# Altium PCB RL_2_Mini_V10.3.PcbDoc
Units mm, origin at the board's own origin, x right, y up, seen from the top; angles counter-clockwise.
Board outline 37.5 x 37.5 mm, 2 copper layers (Top Layer, Bottom Layer); 41 components, 29 nets, 169 pads, 0 vias.
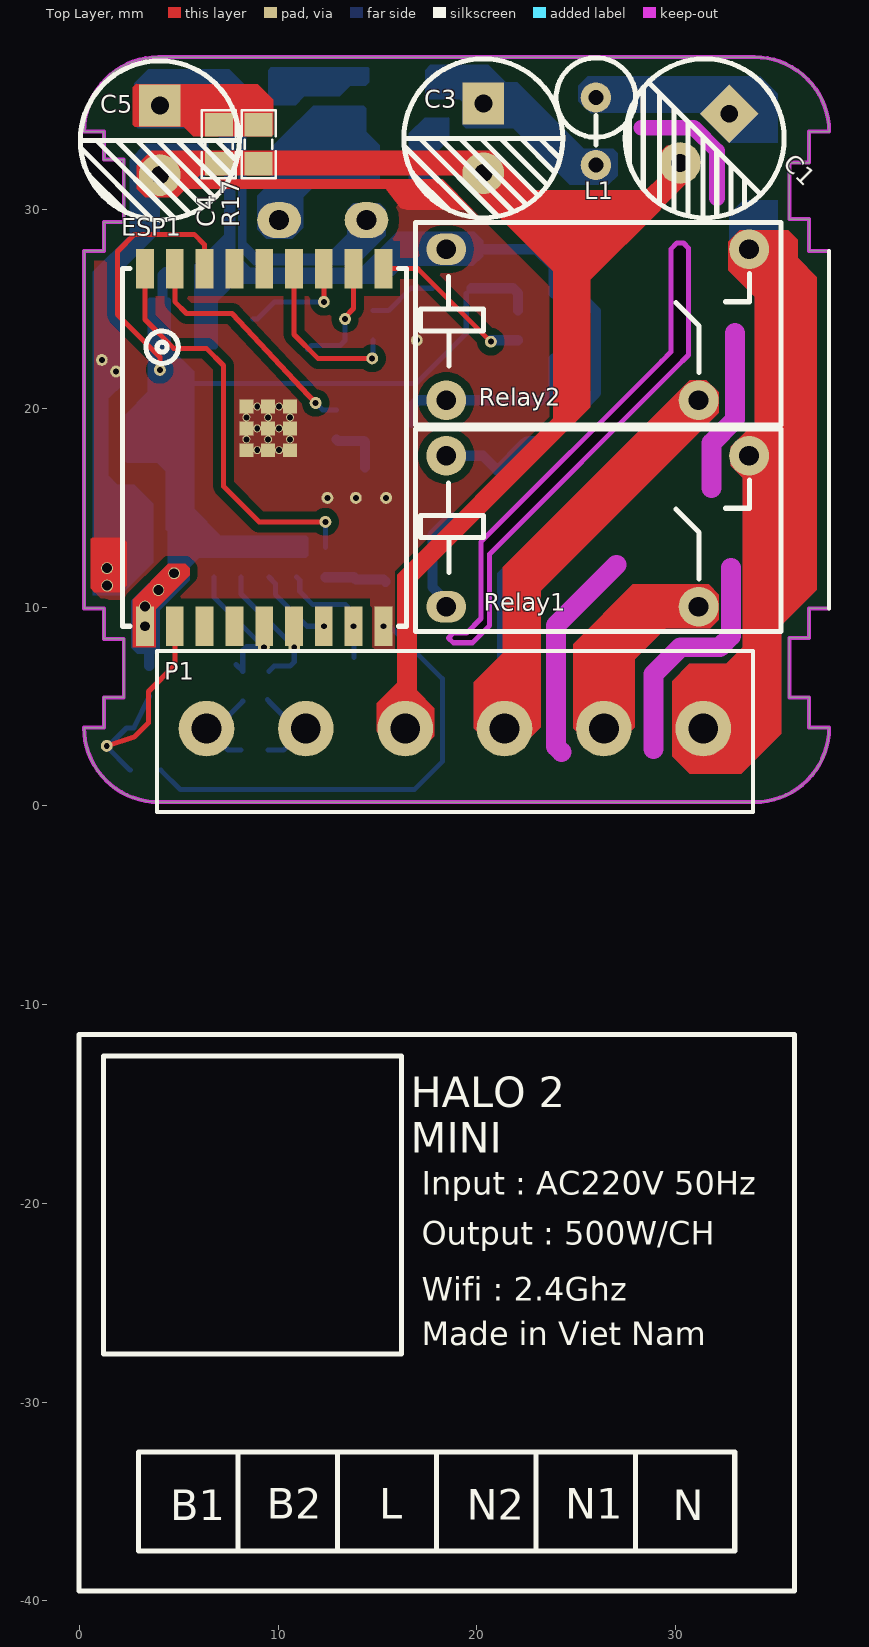
[diagram p0: Top Layer view]
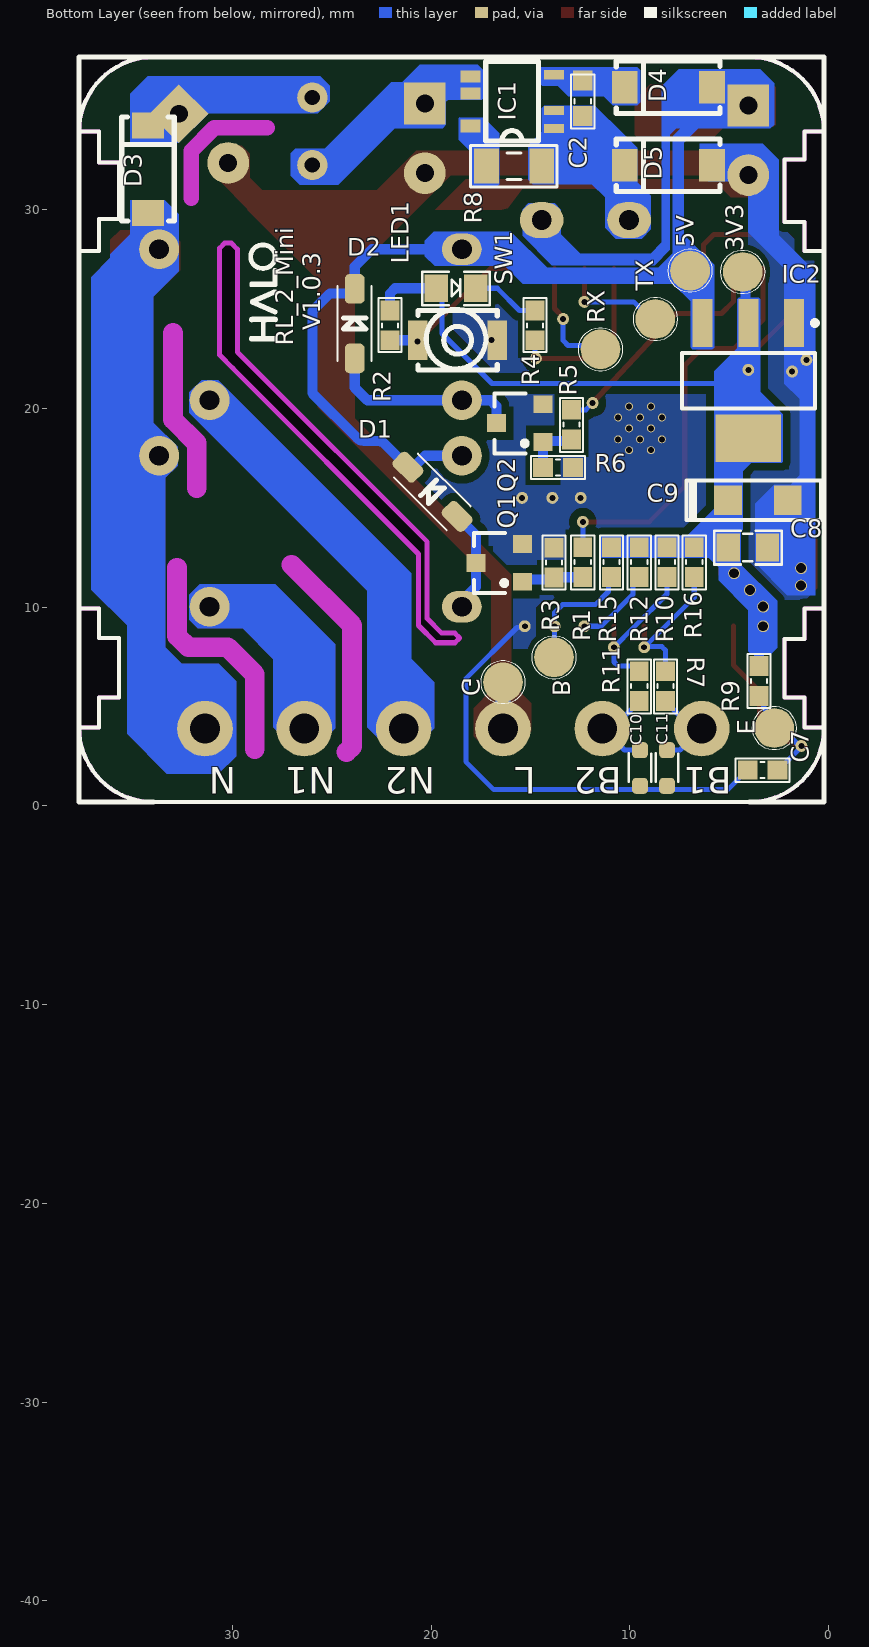
[diagram p1: Bottom Layer view, seen from below]

## Layer stack, top to bottom
Top Solder: solder mask 0.0102, Solder Resist, Dk 3.5
Top Layer: signal copper 0.0356
Dielectric 1: dielectric 0.32, FR-4, Dk 4.8
Bottom Layer: signal copper 0.0356
Bottom Solder: solder mask 0.0102, Solder Resist, Dk 3.5

## Board outline
0.223,3.944 1.223,3.944 1.223,5.461 2.223,5.461 2.223,8.407 1.223,8.407 1.223,9.944 0.223,9.944 0.223,27.944 1.223,27.944 1.223,29.388 2.223,29.388 2.223,32.537 1.223,32.537 1.223,33.944 0.223,33.944 cw(c3.973,33.944) 3.973,37.694 33.973,37.694 cw(c33.973,33.944) 37.723,33.944 36.723,33.944 36.723,32.385 35.723,32.385 35.723,29.54 36.723,29.54 36.723,27.944 37.723,27.944 37.723,9.944 36.723,9.944 36.723,8.458 35.723,8.458 35.723,5.461 36.723,5.461 36.723,3.944 37.723,3.944 cw(c33.973,3.944) 33.973,0.194 3.973,0.194 cw(c3.973,3.944)
cut-out: 18.567,8.458 18.809,8.217 19.774,8.217 20.637,9.08 20.637,12.687 29.985,22.034 30.645,22.695 30.645,28.08 30.391,28.334 30.061,28.334 29.756,28.029 29.756,22.847 29.299,22.39 20.206,13.297 20.206,9.436 19.469,8.7 18.809,8.7

## Design rules (kind name [scope] priority, off if disabled: settings)
Clearance [All] p1: gap=0.4 ignorepadtopadclearanceinfootprint=FALSE
PolygonConnect [All] p1: connectstyle=Direct reliefconductorwidth=0.254 reliefentries=4 polygonreliefangle="90 Angle" airgapwidth=0.254
RoomDefinition RL_2SW_MINI_V1.0.3 [InComponentClass('RL_2SW_MINI_V1.0.3')] p1: confinementstyle=ConfineIn formatcopy=TRUE lockcomponents=FALSE outline 110.973,-17.983 213.716,-17.983 213.716,6.655 110.973,6.655
RoutingVias [All] p1: holewidth=0.711 width=1.27 viastyle="Through Hole" minholewidth=0.711 minwidth=1.27 maxholewidth=0.711 maxwidth=1.27
SolderMaskExpansion [All] p1: expansion=0.102 istentingtop=FALSE
Width [All] p1: maxlimit=0.762 minlimit=0.254 preferedwidth=0.508
30 further rules are at their usual default settings.

## Components (designator, comment, footprint, x,y, rotation, side; value= is the part's Value field where it differs from the comment)
C1 "4.8uF-400V" "tu hoa 8mm" 31.458,33.604 r225 top
C2 "105 (0603)" "tu 0603"#1 12.37,35.472 r270 bottom
C3 "4.8uF-400V" "tu hoa 8mm" 20.32,33.604 r270 top
C4 "105" "tu 0805" 7.019,33.309 r270 top
C5 "100uF-50V" "tu hoa 8mm" 4.039,33.505 r270 top
C7 "105 (0603)" "tu 0603"#2 3.315,1.803 r0 bottom
C8 "104 (0805)" "tu 0805" 4.064,13.018 r180 bottom
C9 "10uF" "tu tantalum smd3216" 3.555,15.392 r180 bottom
C10 "104" "CAP 0603" 9.491,1.013 r180 bottom
C11 "104" "CAP 0603" 8.128,1.013 r180 bottom
D1 "Diode" SOD-123 19.935,15.816 r45 bottom
D2 "Diode" SOD-123 23.851,24.28 r90 bottom
D3 "Diode" SMA 34.255,29.849 r90 bottom
D4 "Diode" SMA 5.862,36.17 r0 bottom
D5 "ES2J" SMA 5.862,32.259 r0 bottom
ESP1 "ESP32-C3-WROOM-02" "ESP32-C3-WROOM 02U" 3.291,9.047 r90 top
IC1 "BP2525" SOT23-5 13.818,34.105 r0 bottom
IC2 "AMS1117 3.3V" SOT223 4.039,21.412 r270 bottom
L1 "Cuon Cam" "0510 - H" 25.984,35.659 r270 top
LED1 "led do 0805" "led 0805" 18.745,26.06 r180 bottom
P1 "Header 6" KF127-3P 6.387,3.897 r0 top
Q1 "S8050" SOT23B 16.58,12.338 r90 bottom
Q2 "S8050" SOT23B 15.546,19.37 r90 bottom
R1 "1k (0603)" "tro 0603" 12.37,12.274 r270 bottom
R2 "10k (0603)" "tro 0603" 22.073,24.194 r90 bottom
R3 "10k (0603)" "tro 0603" 13.818,12.249 r90 bottom
R4 "330R (0603)" "tro 0603" 14.776,24.194 r90 bottom
R5 "1k (0603)" "tro 0603" 12.939,19.193 r270 bottom
R6 "10k (0603)" "tro 0603" 13.621,17.031 r180 bottom
R7 "50R" "tro 0603" 8.213,6.032 r270 bottom
R8 "0.5R" "TRO 1206" 15.829,32.208 r0 bottom
R9 "10k (0603)" "tro 0603" 3.505,6.287 r90 bottom
R10 "10k (0603)" "tro 0603" 8.128,12.274 r270 bottom
R11 "50R" "tro 0603" 9.528,6.032 r270 bottom
R12 "10k (0603)" "tro 0603" 9.528,12.274 r270 bottom
R15 "10k (0603)" "tro 0603" 10.928,12.274 r270 bottom
R16 "10k (0603)" "tro 0603" 6.761,12.274 r270 bottom
R17 "1.5k (0805)" "tro 0805" 9.001,33.335 r90 top
Relay1 "ALLDP" HF32FA-G-HSL2#1 18.456,17.628 r0 top
Relay2 "ALLDP" HF32FA-G-HSL2#2 18.456,28.022 r0 top
SW1 "SW" "SW 3x4mm SMD" 20.676,23.444 r180 bottom

## Footprints (in the part's own frame and the unit in brackets; to place one, negate y for a bottom-side part, rotate by r counter-clockwise, add the part's x,y. Pads: shape width x height; smd on the part's side, far side on the other; paste and mask are expansions set on the pad)
"0510 - H" [mil]
  round 60 hole 30: 1(0,0) 2(133.86,0)
  silkscreen extent -79,-79 94,79
"CAP 0603" [mm]
  rrect50% 0.8x0.8 smd: 1(0,0) 2(0,1.8)
  silkscreen extent -0.57,0.2 0.56,1.64, body extent -0.4,0.11 0.4,1.71, height 0.5
"ESP32-C3-WROOM 02U" [mm]
  rect 2x0.9 smd: 1(0,0) 2(0,-1.5) 3(0,-3) 4(0,-4.5) 5(0,-6) 6(0,-7.5) 7(0,-9) 8(0,-10.5) 9(0,-12) 10(18,-12) 11(18,-10.5) 12(18,-9) 13(18,-7.5) 14(18,-6) 15(18,-4.5) 16(18,-3) 17(18,-1.5) 18(18,0)
  round 0.4 hole 0.3 mask+0.102: 9(10.51,-6.2) 19(8.86,-6.75) 19(8.86,-5.65) 19(9.41,-7.3) 19(9.41,-6.2) 19(9.41,-5.1) 19(9.96,-6.75) 19(9.96,-5.65) 19(10.51,-7.3) 19(10.51,-5.1) 19(11.06,-6.75) 19(11.06,-5.65)
  rect 0.7x0.7 smd: 19(8.86,-7.3) 19(8.86,-6.2) 19(8.86,-5.1) 19(9.96,-7.3) 19(9.96,-6.2) 19(9.96,-5.1) 19(11.06,-7.3) 19(11.06,-6.2) 19(11.06,-5.1)
  silkscreen extent 0,-13.16 18.01,1.14, body extent 0.02,-13.16 18.02,1.14, height 3.31
HF32FA-G-HSL2#1 [mm]
  round 2 hole 1: 1(0,0) 3(12.7,-7.6) 4(15.24,0)
  oval 2x1.6 hole 1: 2(0,-7.6)
  silkscreen extent -1.55,-8.85 16.85,1.35, body extent -1.4,-8.7 16.7,1.2, height 12.3
HF32FA-G-HSL2#2 [mm]
  oval 2x1.6 hole 1: 1(0,0)
  round 2 hole 1: 2(0,-7.6) 3(12.7,-7.6) 4(15.24,0)
  silkscreen extent -1.55,-8.85 16.85,1.35, body extent -1.4,-8.7 16.7,1.2, height 12.3
KF127-3P [mm]
  round 2.8 hole 1.5 mask+0.05: 1(0,0) 2(5,0) 3(10,0) 4(15,0) 5(20,0) 6(25,0)
  silkscreen extent -2.5,-4.2 27.5,3.9, body extent -2.5,-4.2 27.5,3.9, height 10.11
"led 0805" [mm]
  rect 1.18x1.4 smd: 1(-0.991,0) 2(0.991,0)
  silkscreen extent -1.7,-0.86 1.7,0.84, body extent -1.01,-0.62 1.01,0.63, height 1.1
SMA [mm]
  rect 1.3x1.63 smd: 1(0,0) 2(4.4,0)
  silkscreen extent -0.41,-1.32 4.83,1.32, body extent -0.39,-1.3 4.81,1.31, height 2.2
SOD-123 [mm]
  rrect50% 1.5x1 smd: 1(-1.75,0) 2(1.75,0)
  silkscreen extent -1.88,-0.84 1.88,0.86, body extent -1.87,-0.85 1.88,0.85, height 1.2
SOT23-5 [mm]
  rect 1x0.46 smd: 1(0,0) 2(0,-0.9) 3(0,-2.7)
  rect 1x0.6 smd: 4(4.2,-2.61) 4(4.2,-1.76)
  rect 1x0.66 smd: 5(4.2,-0.125)
  silkscreen extent 0.77,-3.38 3.44,0.64, body extent -0.07,-3.37 4.15,0.63, height 1.25
SOT23B [mm] "SOT 23B"
  rect 0.9x0.95 smd: 1(-1.052,-1.175) 2(0.848,-1.175) 3(-0.102,1.175)
  silkscreen extent -1.63,-0.38 1.4,1.27, body extent -1.6,-1.2 1.4,1.3, height 1.1
SOT223 [mm] "SOT223, 4-Leads, Body 6.5x3.5mm, Pitch 2.3mm, Lead Span 7mm, IPC Medium Density"
  rect 2.4x1 smd: 1(-2.9,2.3) 2(-2.9,0) 3(-2.9,-2.3)
  rect 2.4x3.3 smd: 4(2.9,0)
  silkscreen extent -3.02,-3.35 1.4,3.47, body extent -3.39,-3.27 3.5,3.23, height 1.72
"SW 3x4mm SMD" [mm]
  rect 1x2 smd: 1(0,0) 2(4,0)
  silkscreen extent 0,-1.5 4,1.5
"tro 0603" [mm] "Chip Capacitor, 2-Leads, Body 1,60x0,80mm, IPC Medium Density"
  rect 1x0.95 smd mask+0.076: 1(-0.75,0) 2(0.75,0)
  silkscreen extent -1.35,-0.58 1.37,0.58, body extent -0.82,-0.42 0.82,0.43, height 0.44
"tro 0805" [mm]
  rect 1.18x1.4 smd: 1(-1.016,0) 2(0.965,0)
  silkscreen extent -1.73,-0.86 1.68,0.84, body extent -1.54,-0.7 1.46,0.7, height 0.53
"TRO 1206" [mm]
  rect 1.25x1.75 smd: 1(-1.39,0) 2(1.39,0)
  silkscreen extent -2.16,-1.04 2.18,1.04, body extent -1.6,-0.8 1.6,0.8, height 0.6
"tu 0603"#1 [mm] "Chip Capacitor, 2-Leads, Body 1,60x0,80mm, IPC Medium Density"
  rect 1x1 smd mask+0.076: 1(-1.05,0) 2(0.75,0)
  silkscreen extent -1.35,-0.58 1.37,0.58, body extent -0.8,-0.4 0.8,0.4, height 0.9
"tu 0603"#2 [mm] "Chip Capacitor, 2-Leads, Body 1,60x0,80mm, IPC Medium Density"
  rect 1x0.95 smd mask+0.076: 1(-0.75,0) 2(0.75,0)
  silkscreen extent -1.35,-0.58 1.37,0.58, body extent -0.8,-0.4 0.8,0.4, height 0.9
"tu 0805" [mm] "Compoment SMD 80x50mil"
  rect 1.18x1.4 smd: 1(-0.991,0) 2(0.991,0)
  silkscreen extent -1.7,-0.86 1.7,0.84, body extent -1.01,-0.64 1.01,0.63, height 0.61
"tu hoa 8mm" [mm]
  rect 2.1x2.1 hole 0.9: 1(-1.75,0)
  round 2.1 hole 0.9: 2(1.75,0)
  silkscreen extent -4,-4 4,4, body extent -4.1,-4.07 4.1,4.13, height 14.4
"tu tantalum smd3216" [mm]
  rect 1.4x1.5 smd: 1(-1.5,0) 2(1.5,0)
  silkscreen extent -3.61,-1 3.17,1, body extent -1.7,-0.9 1.7,0.9, height 1.69

## Part data
C1 C3: library part "Tu Hoa 2.2uF 400V 8x12", "Cắm", Chung_Loai=Cắm, Don_Vi=Con, Ma_Hang=MH003743, So_Chan=2, Ten_Linh_Kien="Tụ Hóa 2.2uF 400V 8x12MM"
C2 C7: library part "Tu 0603 105 16V 20%", "Dán", Chung_Loai=Dán, Don_Vi=Con, Ma_Hang=MH004574, So_Chan=2, Ten_Linh_Kien="Tụ 0603 105-1uF 20% 16V"
C4 C8: library part "Tu 0805 104 50V 10%", "Dán", Chung_Loai=Dán, Don_Vi=Con, Ma_Hang=MH004551, So_Chan=2, Ten_Linh_Kien="Tụ 0805 104-100nF 10% 50V"
C5: library part "Tu Hoa 100uF 50V 8x11", "Cắm", Chung_Loai=Cắm, Don_Vi=Con, Ma_Hang=MH006872, So_Chan=2, Ten_Linh_Kien="Tụ Hóa 100uF 50V 8x11MM"
C9: library part "Tu tantalum 10uF 16V SMD3216", "Dán", Chung_Loai=Dán, Don_Vi=Con, Ma_Hang=MH001954, So_Chan=2, Ten_Linh_Kien="Tụ tantalum 106C-10uF 16V SMD3216"
C10 C11: library part "Tu Ceramic", "Tu Ceramic"
D5: library part Diode
IC2 Q1 Q2: "Dán", Chung_Loai=Dán, Don_Vi=Con
  IC2: Kieu_Chan=SOT223, Ma_Hang=MH000596, So_Chan=4, Ten_Linh_Kien="AMS1117-3.3V SOT223"
  Q1 Q2: Ma_Hang=MH004708, Ten_Linh_Kien="S8050 SOT23 Trans NPN 0.5A 40V (J3Y)"
LED1: library part "Led 0805 Do", "Dán", Chung_Loai=Dán, Don_Vi=Con, Ma_Hang=MH000897, So_Chan=2, Ten_Linh_Kien="LED 0805 Màu Đỏ"
P1: "Header, 6-Pin", LatestRevisionDate=17-Jul-2002, LatestRevisionNote="Re-released for DXP Platform.", Publisher="Altium Limited"
R1 R5: library part "Tro 0603 5% 1k", "Dán", Chung_Loai=Dán, Don_Vi=Con, Ma_Hang=MH006319, So_Chan=2, Ten_Linh_Kien="Trở 0603 5% 1k"
R2 R3 R6 R7 R9 R10 R11 R12 R15 R16: library part "Tro 0603 5% 10k", "Dán", Chung_Loai=Dán, Don_Vi=Con, Ma_Hang=MH006316, So_Chan=2, Ten_Linh_Kien="Trở 0603 5% 10k"
R4: library part "Tro 0603 5% 330R", "Dán", Chung_Loai=Dán, Don_Vi=Con, Ma_Hang=MH006910, So_Chan=2, Ten_Linh_Kien="Trở 0603 5% 330R"
R8: library part "Tro 1206 5% 0R", "Dán", Chung_Loai=Dán, Don_Vi=Con, Ma_Hang=MH005902, So_Chan=2, Ten_Linh_Kien="Trở 1206 5% 0R"
R17: library part "Tro 0805 5% 1.5k", "Dán", Chung_Loai=Dán, Don_Vi=Con, Ma_Hang=MH005232, So_Chan=2, Ten_Linh_Kien="Trở 0805 5% 1.5k"
Relay1 Relay2: library part "Relay 4 Chan"
SW1: library part "Nut Nhan 2 chan"

## Free pads (board coordinates)
  round 0.6 hole 0.3 mask+0.102: 78(1.118,22.449) 78(1.835,21.869) 78(4.039,21.952) 78(9.278,7.99) 78(10.804,7.99) 78(11.879,20.284) 78(12.291,9.047) 78(12.291,25.375) 78(12.37,14.3) 78(12.475,15.507) 78(13.36,24.511) 78(13.791,9.047) 78(13.901,15.507) 78(14.728,22.53) 78(15.291,9.047) 78(15.428,15.507) 78(16.971,23.444) 78(20.701,23.368) 83(1.366,3.023)
  round 0.6 hole 0.5 mask+0.102: 78(1.38,11.969) 78(1.388,11.094) 78(3.291,9.047) 78(3.291,10.033) 78(3.962,10.871) 78(4.754,11.715)
  oval 2.2x1.8 hole 1: 80(14.439,29.489) 81(10.041,29.489)
  round 2 smd far side: 82(2.734,3.924) 82(4.324,26.878) 82(6.971,26.949) 82(8.718,24.511) 82(11.481,22.985) 82(13.818,7.48) 82(16.387,6.231)

## Nets (pads, with @x,y where several pads share a name; then routed paths per layer and width w, separated by ;. In a path a pad name is that pad's centre, name@x,y a point inside that pad or via, vN(x,y) a via of type N, cw(c..) or ccw(c..) an arc to the next point about the centre after c; other vN are vias at no path point)
3V3: C8.1 C9.1 ESP1.1 ESP1.16 IC2.2 IC2.4 LED1.1 pad.78@3.291,9.047 pad.78@3.291,10.033 pad.78@3.962,10.871 pad.78@4.039,21.952 pad.78@4.754,11.715 pad.82@4.324,26.878 R2.2 R9.2 R10.1 R12.1 R15.1 R16.1 | length 39
  Top Layer w0.254: pad.78@4.039,21.952 4.039,22.596 1.905,24.73 1.905,27.914 2.767,28.776 5.768,28.776 6.291,28.253 ESP1.16
  Bottom Layer w0.254: 5.041,21.261 16.941,21.261 19.461,23.781 19.461,25.785 LED1.1
  Bottom Layer w0.508: pad.78@3.291,9.047 3.291,9.022 3.505,8.808 R9.2 ; IC2.2 4.181,24.455 4.181,26.735 pad.82@4.324,26.878 ; LED1.1 21.812,26.06 22.073,25.8 R2.2
+5: C4.1 C5.1 D1.2 D2.2 D4.1 IC2.3 pad.80 pad.82@6.971,26.949 R17.2 Relay1.1 Relay2.1 | length 22.2
  Bottom Layer w0.508: Relay1.1 20.304,17.628 20.57,17.362 21.009,16.922 21.009,16.891 22.35,18.232 cw(c22.709,17.872) 22.709,18.38 23.377,18.38 ccw(c23.377,18.888) 23.736,18.529 25.984,20.777 25.984,24.917 25.102,25.8 23.851,25.8 23.851,27.153 22.982,28.022 19.456,28.022
B1: ESP1.5 pad.78@9.278,7.99 R7.1 R16.2 | length 8.3
  Top Layer w0.254: pad.78@9.278,7.99 9.278,9.035 ESP1.5
  Bottom Layer w0.254: R16.2 6.761,10.508 pad.78@9.248,8.021 ; R7.1@7.876,7.119 R7.1 8.213,7.842 8.391,8.021 pad.78@9.248,8.021 ; pad.78@9.278,7.99 pad.78@9.248,8.021
B2: ESP1.6 pad.78@10.804,7.99 R10.2 R11.1 | length 7.9
  Top Layer w0.254: ESP1.6 10.804,9.034 pad.78@10.804,7.99
  Bottom Layer w0.254: R10.2 8.128,10.666 9.804,8.99 10.804,7.99 10.804,7.25 10.591,7.037 9.783,7.037 R11.1
BOOT: ESP1.8 pad.78@13.791,9.047 pad.82@13.818,7.48 R15.2 | length 6.2
  Bottom Layer w0.254: R15.2 11.079,11.373 11.079,10.792 11.737,10.135 13.383,10.135 13.791,9.727 13.791,9.047 13.804,9.034 13.804,7.494 pad.82@13.818,7.48
BT_PAIR: ESP1.10 pad.78@20.701,23.368 R2.1 SW1.1 | length 8.3
  Top Layer w0.254: ESP1.10 17.022,27.047 pad.78@20.701,23.368
  Bottom Layer w0.508: SW1.1 R2.1
EN: C7.1 ESP1.2 pad.82@2.734,3.924 pad.83 R9.1 | length 13.1
  Top Layer w0.254: pad.83 2.748,3.473 3.464,4.189 3.464,5.766 4.791,7.093 ESP1.2 ESP1.2@4.793,9.049
  Bottom Layer w0.254: C7.1 2.54,1.803 1.366,2.978 pad.83 1.459,3.023 2.361,3.924 2.734,3.924 3.516,5.526 R9.1
L: C1.2 C3.2 C4.2 C5.2 C7.2 C8.2 C9.2 C10.1 C11.1 D5.1 ESP1.9 ESP1.19 IC2.1 P1.3 pad.78@1.38,11.969 pad.78@1.118,22.449 pad.78@1.388,11.094 pad.78@1.835,21.869 pad.78@12.475,15.507 pad.78@13.901,15.507 pad.78@15.291,9.047 pad.78@15.428,15.507 pad.78@16.971,23.444 pad.82@16.387,6.231 Q1.2 Q2.2 R3.2 R6.2 R17.1 SW1.2 | length 25.8
  Top Layer w0.254: P1.3@16.387,4.597 P1.3@16.387,4.695
  Bottom Layer w0.254: C7.2 4.09,1.803 5.073,0.821 8.128,0.821 9.491,0.821 16.848,0.821 18.256,2.229 18.256,6.407 15.681,8.982 15.356,8.982 pad.78@15.291,9.047
  Bottom Layer w0.762: P1.3 pad.82@16.387,6.231
LED: ESP1.13 pad.78@14.728,22.53 R4.1 | length 8.7
  Top Layer w0.254: ESP1.13 10.791,23.728 11.989,22.53 pad.78@14.728,22.53
  Bottom Layer w0.254: pad.78@14.728,22.53 14.776,22.577 R4.1
N: D3.1 P1.6 Relay1.4 Relay2.4 | length 24.8
  Top Layer w0.381: P1.6@31.387,4.597 34.696,7.907 34.696,17.628 34.696,28.022
N1: P1.5 Relay1.3 | length 6.6
  Bottom Layer w0.381: P1.5@26.387,4.597 26.387,7.184 29.23,10.028
N2: P1.4 Relay2.3 | length 0.6
  Top Layer w0.762: P1.4@21.387,4.597 P1.4@21.387,5.149
NetC1_1: C1.1 D3.2 L1.1
NetC2_1: C2.1 D4.2 IC1.3
NetC2_2: C2.2 D5.2 IC1.1 IC1.2 pad.81 R8.1
NetC3_1: C3.1 IC1.4 L1.2
NetC10_2: C10.2 P1.2 R11.2 | length 4.9
  Bottom Layer w0.254: R11.2@9.459,5.351 R11.2 9.528,5.257 10.888,3.897 P1.2@11.356,3.897 ; C10.2 10.272,2.813 P1.2@11.356,3.897 ; P1.2 P1.2@11.356,3.897
NetC11_2: C11.2 P1.1 R7.2 | length 5.3
  Top Layer w0.254: P1.1 P1.1@6.387,4.597
  Bottom Layer w0.254: P1.1 P1.1@6.39,3.897 ; C11.2 7.474,2.813 P1.1@6.39,3.897 ; R7.2 8.213,5.257 6.852,3.897 P1.1@6.39,3.897
NetD1_1: D1.1 Q1.3 Relay1.2 | length 5.2
  Bottom Layer w0.508: Relay1.2 18.456,10.323 17.755,11.024 Q1.3 17.755,13.636 D1.1
NetD2_1: D2.1 Q2.3 Relay2.2 | length 9.1
  Bottom Layer w0.508: Q2.3 16.721,20.124 17.019,20.422 Relay2.2 ; Relay2.2@19.161,20.422 23.215,20.422 23.851,21.057 D2.1
NetESP1_7: ESP1.7 pad.78@12.291,9.047 R12.2 | length 4.1
  Bottom Layer w0.254: R12.2 9.851,11.201 9.851,10.64 11.444,9.047 pad.78@12.291,9.047
NetIC1_5: IC1.5 R8.2
NetLED1_2: LED1.2 R4.2 | length 3.4
  Bottom Layer w0.254: R4.2 15.555,24.944 16.671,26.06 LED1.2
NetQ1_1: Q1.1 R1.2 R3.1 | length 3.1
  Bottom Layer w0.508: R1.2 12.383,11.512 13.805,11.512 R3.1 13.924,11.393 15.298,11.393 Q1.1
NetQ2_1: Q2.1 R5.2 R6.1 | length 2.8
  Bottom Layer w0.508: R5.2 13.002,18.38 14.309,18.38 Q2.1 R6.1
RL1: ESP1.18 pad.78@12.37,14.3 R1.1 | length 20.7
  Top Layer w0.254: ESP1.18 3.291,24.483 4.736,23.038 6.375,23.038 7.239,22.174 7.239,16.087 9.026,14.3 pad.78@12.37,14.3
  Bottom Layer w0.254: R1.1 pad.78@12.37,14.3
RL2: ESP1.17 pad.78@11.879,20.284 R5.1 | length 12.2
  Top Layer w0.254: ESP1.17 4.791,25.384 5.385,24.79 7.673,24.79 pad.78@11.879,20.284
  Bottom Layer w0.254: pad.78@11.879,20.284 12.22,19.943 R5.1
RX: ESP1.11 pad.78@13.36,24.511 pad.82@11.481,22.985 | length 5.9
  Top Layer w0.254: pad.78@13.36,24.511 13.36,24.605 13.791,25.035 ESP1.11
  Bottom Layer w0.254: pad.82@11.481,22.985 11.676,23.18 13.114,23.18 13.36,23.426 pad.78@13.36,24.511
TX: ESP1.12 pad.78@12.291,25.375 pad.82@8.718,24.511 | length 5.6
  Top Layer w0.254: pad.78@12.291,25.375 ESP1.12
  Bottom Layer w0.254: pad.82@8.718,24.511 8.944,24.511 9.807,25.375 pad.78@12.291,25.375
pads on no net: ESP1.3 ESP1.4 ESP1.14 ESP1.15

## Polygon pours and split planes (outlines as drawn)
L on Top Layer "NONET_L-01_P-001" (solid, remove dead copper, pour order 1): 15.872,7.909 15.872,11.808 23.647,19.583 23.647,26.162 19.538,30.271 3.449,30.271 1.524,28.346 1.524,27.635 0.762,27.635 0.533,27.407 0.533,10.984 1.127,10.39 14.324,10.39 14.728,9.985 14.728,7.907
L on Bottom Layer "NONET_L-01_P-001" (solid, remove dead copper, pour order 0): 15.872,7.909 15.872,11.808 23.647,19.583 23.647,26.162 19.538,30.271 3.449,30.271 1.524,28.346 1.524,27.635 0.762,27.635 0.533,27.407 0.533,10.984 1.127,10.39 14.324,10.39 14.728,9.985 14.728,7.907

## Keep-outs
Keep-Out Layer:
  lines w0.2: 0.223,3.944 ccw(c3.973,3.944) 3.973,0.194 33.973,0.194 ccw(c33.973,3.944) 37.723,3.944 36.723,3.944 36.723,5.461 35.723,5.461 35.723,8.458 36.723,8.458 36.723,9.944 37.723,9.944 37.723,27.944 36.723,27.944 36.723,29.54 35.723,29.54 35.723,32.385 36.723,32.385 36.723,33.944 37.723,33.944 ccw(c33.973,33.944) 33.973,37.694 3.973,37.694 ccw(c3.973,33.944) 0.223,33.944 1.223,33.944 1.223,32.537 2.223,32.537 2.223,29.388 1.223,29.388 1.223,27.944 0.223,27.944 0.223,9.944 1.223,9.944 1.223,8.407 2.223,8.407 2.223,5.461 1.223,5.461 1.223,3.944 0.223,3.944
  lines w0.254: 18.567,8.458 18.809,8.7 19.469,8.7 20.206,9.436 20.206,13.297 29.299,22.39 29.756,22.847 29.756,28.029 30.061,28.334 30.391,28.334 30.645,28.08 30.645,22.695 29.985,22.034 20.637,12.687 20.637,9.08 19.774,8.217 18.809,8.217 18.567,8.458
  lines w0.8: 28.27,34.138 30.912,34.138 32.08,32.969 32.08,30.607
  lines w1: 24.257,2.718 23.978,2.997 23.978,9.093 27.026,12.141 ; 28.88,2.87 28.88,6.629 30.241,7.99 32.222,7.99 32.791,8.56 32.791,11.989 ; 31.801,16.002 31.801,18.262 32.995,19.456 32.995,23.8

## Other copper
Top Layer:
  region net L: 30.399,33.228 29.545,33.228 29.139,32.822 29.139,31.62 28.507,30.988 22.738,30.988 20.744,32.982 3.594,32.982 2.87,32.258 2.87,31.064 3.302,30.632 4.925,30.632 6.048,31.755 19.007,31.755 21.272,29.489 28.683,29.489 31.156,31.962 31.156,32.471 ccw(c30.399,32.471)
  region net N: 29.82,6.285 30.693,7.163 32.555,7.163 33.376,7.983 33.376,16.51 32.766,17.12 32.766,18.073 33.985,19.292 33.985,25.629 32.642,26.972 32.642,28.4 33.224,28.982 35.661,28.982 36.144,28.499 36.144,27.584 37.109,26.619 37.109,10.897 35.306,9.093 35.306,3.632 33.299,1.626 30.709,1.626 29.82,2.515
  region net N1: 24.841,8.153 27.838,11.151 31.659,11.151 32.167,10.643 32.167,9.37 31.74,8.944 29.492,8.944 27.94,7.391 27.94,3.962 27.026,3.048 25.705,3.048 24.841,3.912
  region net N2: 19.837,6.236 21.302,7.7 21.302,12.018 30.721,21.438 31.547,21.438 32.167,20.818 32.167,19.797 23.216,10.846 23.216,3.976 22.276,3.036 20.726,3.036 19.837,3.925
  region net +5: 2.997,36.322 8.966,36.322 9.754,35.535 9.754,33.782 9.677,33.706 5.722,33.706 5.238,34.189 2.778,34.189 2.667,34.3 2.667,36.17 2.845,36.347
  region net 3V3: 2.667,10.39 4.471,12.194 5.316,12.194 5.54,11.969 5.54,11.605 3.828,9.893 3.828,7.992 3.826,7.99 2.667,7.99
  region net L: 14.961,5.182 15.977,6.198 15.977,11.639 23.851,19.513 23.851,26.915 21.022,29.743 21.302,30.023 29.252,30.023 25.705,26.475 25.705,20.075 16.971,11.341 16.971,5.816 17.856,4.931 17.856,3.505 17.374,3.023 15.697,3.023 14.961,3.759
  region net L: 5.118,31.064 15.413,31.064 16.154,30.094 16.454,30.023 19.791,30.023 18.267,31.547 5.334,31.547
  region net L: 2.134,13.513 2.371,13.276 2.371,11.111 2.029,10.77 0.747,10.77 0.559,10.958 0.559,13.445 0.626,13.513
Bottom Layer:
  region net NetC1_1: 25.883,34.874 31.203,34.874 32.695,33.382 35.139,33.382 35.139,35.851 34.255,36.734 25.577,36.734 25.102,36.259 25.102,35.481 25.723,34.86
  region net N: 29.82,6.285 30.693,7.163 32.555,7.163 33.376,7.983 33.376,16.51 32.766,17.12 32.766,18.073 33.985,19.292 33.985,25.629 32.705,26.909 32.705,29.784 33.4,30.479 34.164,30.479 35.139,30.479 35.139,28.772 36.144,27.767 36.144,27.584 37.109,26.619 37.109,10.897 35.306,9.093 35.306,3.632 33.299,1.626 30.709,1.626 29.82,2.515
  region net N1: 24.841,8.153 27.838,11.151 31.659,11.151 32.167,10.643 32.167,9.37 31.74,8.944 29.492,8.944 27.94,7.391 27.94,3.962 27.026,3.048 25.705,3.048 24.841,3.912
  region net N2: 19.837,6.236 21.009,7.408 21.009,11.726 30.721,21.438 31.547,21.438 32.167,20.818 32.167,19.797 23.215,10.845 23.215,3.975 22.276,3.036 20.726,3.036 19.837,3.925
  pour cut-out: 3.033,24.759 5.615,24.759 7.112,26.256 7.112,30.211 6.852,30.471 4.039,30.471 4.039,27.457 3.033,26.452
  region net L: 0.66,12.624 0.66,10.604 2.071,10.604 3.7,12.233
  region net L: 3.7,12.233 1.044,12.24 0.66,12.624 0.66,26.878 2.515,28.732 2.515,32.537 3.302,33.325 6.477,33.325 6.477,31.858 6.058,31.439 4.665,31.439 4.039,30.812 4.039,28.885 2.223,27.069 2.223,21.261 1.448,20.486 1.448,16.637 1.905,16.18 2.743,16.18 3.7,15.223
  region net NetIC1_5: 18.513,34.653 17.366,34.653 16.577,33.864 16.577,31.304 16.653,31.228 17.875,31.228 18.086,31.439 18.086,33.012 18.613,33.539 18.613,34.609 18.567,34.654
  region net NetC3_1: 26.081,33.091 25.365,33.091 22.019,36.437 19.27,36.437 19.259,36.425 19.259,34.282 19.437,34.105 21.838,34.105 24.674,31.269 26.615,31.269 27.076,31.731 27.076,32.863 26.849,33.09
  region net NetC3_1: 17.514,35.543 19.153,35.543 19.259,35.438 19.259,34.282 19.426,34.115 21.335,34.115 21.448,34.228 21.448,36.437 20.571,37.314 17.657,37.314 17.386,37.044 17.386,35.611 17.454,35.543
  region net NetC2_1: 9.491,35.41 9.491,37.04 9.63,37.179 14.526,37.179 14.582,37.122 14.582,36.425 14.567,36.425 14.403,36.261 13.634,36.261 13.09,35.717 11.315,35.717 10.869,35.271 9.629,35.271
  region net +5: 5.791,34.112 6.554,34.112 7.281,33.385 7.281,28.762 5.766,27.247 5.766,23.066 5.847,22.985 6.852,22.985 6.947,23.08 6.947,25.393 7.842,26.288 15.391,26.288 16.295,27.191 19.825,27.191 20.316,27.682 20.316,28.46 19.869,28.907 17.793,28.907 15.985,28.907 14.159,27.08 8.583,27.08 7.842,27.821 7.842,33.698 6.886,34.654
  region net +5: 14.732,30.328 13.777,30.328 13.471,30.022 13.471,28.781 12.495,27.805 8.957,27.805 8.391,28.371 8.391,36.222 7.529,37.084 3.443,37.084 2.743,36.384 2.743,34.29 2.929,34.105 7.671,34.105 7.988,33.787 7.988,27.986 8.76,27.215 13.921,27.215 15.405,28.698 15.405,30.034 15.113,30.326
  region net NetC2_2: 11.757,35.255 14.311,35.255 14.439,35.127 14.439,33.934 15.113,33.26 15.113,31.508 14.897,31.293 11.912,31.293 11.251,30.632 11.251,29.105 10.701,28.555 9.407,28.555 8.941,29.021 8.941,30.706 9.629,31.394 9.629,33.127 10.309,33.807
  region net 3V3: 11.455,13.564 11.405,13.614 7.112,13.614 5.766,14.961 5.766,21.869 4.597,23.038 4.597,25.511 4.514,25.594 3.516,25.594 3.437,25.514 3.437,20.847 2.311,19.721 2.311,17.327 2.369,17.269 3.903,17.269 4.327,16.846 4.327,13.903 4.425,13.804 4.425,12.154 2.591,10.32 2.591,7.976 2.896,7.671 3.924,7.671 4.039,7.785 4.039,9.855 5.537,11.354 5.537,12.014 6.025,12.502 11.411,12.502 11.506,12.597 11.506,13.513

## Silkscreen, mask and mechanical layers (free items; w line width, h text height)
Top Overlay:
  lines w0.2: 37.723,9.944 37.723,27.944
  lines w0.254: 7.975,-37.506 7.975,-32.506 ; 12.975,-37.506 12.975,-32.506 ; 22.975,-37.506 22.975,-32.506 ; 27.975,-37.506 27.975,-32.506 ; 7.975,-32.506 12.975,-32.506 ; 7.975,-32.506 2.975,-32.506 2.975,-37.506 17.975,-37.506 ; 12.975,-32.506 17.975,-32.506 ; 17.975,-37.506 17.975,-32.506 ; 17.975,-37.506 32.975,-37.506 32.975,-32.506 ; 17.975,-32.506 22.975,-32.506 ; 22.975,-32.506 27.975,-32.506 ; 27.975,-32.506 32.975,-32.506 ; 32.975,-32.506 32.975,-32.506 ; -0.025,-39.506 -0.025,-11.506 35.975,-11.506 35.975,-39.506 -0.025,-39.506 ; 1.194,-27.573 16.194,-27.573 16.194,-12.573 1.194,-12.573 1.194,-27.573
  text "HALO 2  / MINI" at 16.665,-17.45 h1.52
  text "LOGO" at -8.992,-18.11 h1.52
  text "Input : AC220V 50Hz" at 17.221,-19.964 h2
  text "Output : 500W/CH" at 17.221,-22.479 h2
  text "Wifi : 2.4Ghz" at 17.221,-25.302 h2
  text "Made in Viet Nam" at 17.221,-27.553 h2
  text "B2" at 9.423,-35.865 h1.52
  text "L" at 15.088,-35.865 h1.52
  text "N1" at 24.435,-35.865 h1.52
  text "N2" at 19.482,-35.916 h1.52
  text "B1" at 4.572,-35.941 h1.52
  text "N" at 29.845,-35.941 h1.52
Bottom Overlay:
  drawing of 52 lines, arcs and shapes, not listed
  text "5V" at 6.492,28.12 h1.52 r270
  text "3V3" at 3.99,27.92 h1.52 r270
  text "TX" at 8.516,25.922 h1.52 r270
  text "RX" at 10.973,24.296 h1.52 r270
  text "V1.0.3" at 25.293,23.942 h1.5 r270
  text "RL_2_Mini" at 26.637,23.17 h1.5 r270
  text "B" at 14.191,5.512 h1.52 r90
  text "G" at 18.733,5.512 h1.52 r90
  text "E" at 4.902,3.581 h1.52 r90
  text "B1" at 4.875,2.4 h2.29 r180
  text "B2" at 10.407,2.4 h2.29 r180
  text "L" at 14.744,2.4 h2.29 r180
  text "N2" at 19.805,2.4 h2.29 r180
  text "N1" at 24.805,2.4 h2.29 r180
  text "N" at 29.805,2.4 h2.29 r180
Bottom Solder:
  region: 32.842,28.626 32.842,30.124 33.325,30.607 34.95,30.607 35.128,30.429 35.128,28.689 35.992,27.826 35.992,25.73
  region: 35.136,34.638 35.136,35.715 34.174,36.678 32.982,36.678 32.695,36.391 32.695,34.132 33.325,33.503
  region: 2.724,8.318 2.724,10.319 4.43,12.025 5.147,12.025 5.297,11.875 5.297,11.428 3.962,10.094 3.962,8.458 3.607,8.103 2.87,8.103 2.725,8.248
  region: 5.245,31.338 4.37,31.338 4.277,31.431 4.277,33.123 4.321,33.167 5.246,33.167
  region: 10.592,33.17 11.466,33.17 11.559,33.076 11.559,31.478 11.422,31.341 10.591,31.341
  region: 10.592,37.084 11.466,37.084 11.56,36.991 11.56,35.791 11.024,35.255 10.591,35.255
  region: 5.354,36.889 5.15,37.092 4.084,37.092 3.841,36.849 3.841,36.156 4.046,35.95 5.253,35.95 5.354,36.051
  region: 2.179,22.513 1.975,22.716 0.909,22.716 0.666,22.473 0.666,21.779 0.871,21.573 2.078,21.573 2.179,21.674
  region: 0.965,12.294 0.762,12.09 0.762,11.024 1.005,10.781 1.699,10.781 1.904,10.986 1.904,12.193 1.803,12.294
  lines w1.2: 31.387,4.597 32.248,4.597
  lines w1.6: 21.387,5.149 21.387,6.045 21.996,6.655 21.996,11.112 31.306,20.422 ; 26.387,4.597 26.387,7.614 28.801,10.028 31.156,10.028 ; 32.248,4.597 34.46,6.81 34.46,18.392 35.484,19.415 35.484,26.438 33.902,28.019

## Text inside footprints (layer, text, board x,y; h text height)
C10: Mechanical 1 "0603" at 9.874,1.773 h0.5
C11: Mechanical 1 "0603" at 8.511,1.773 h0.5